# Altium PCB Nav_PCB.PcbDoc (part 2 of 2)
Units mil, origin at the board's own origin, x right, y up, seen from the top; angles counter-clockwise.
Board outline 7505 x 3865 mil, 2 copper layers (Top Layer, Bottom Layer); 202 components, 122 nets, 573 pads, 100 vias.
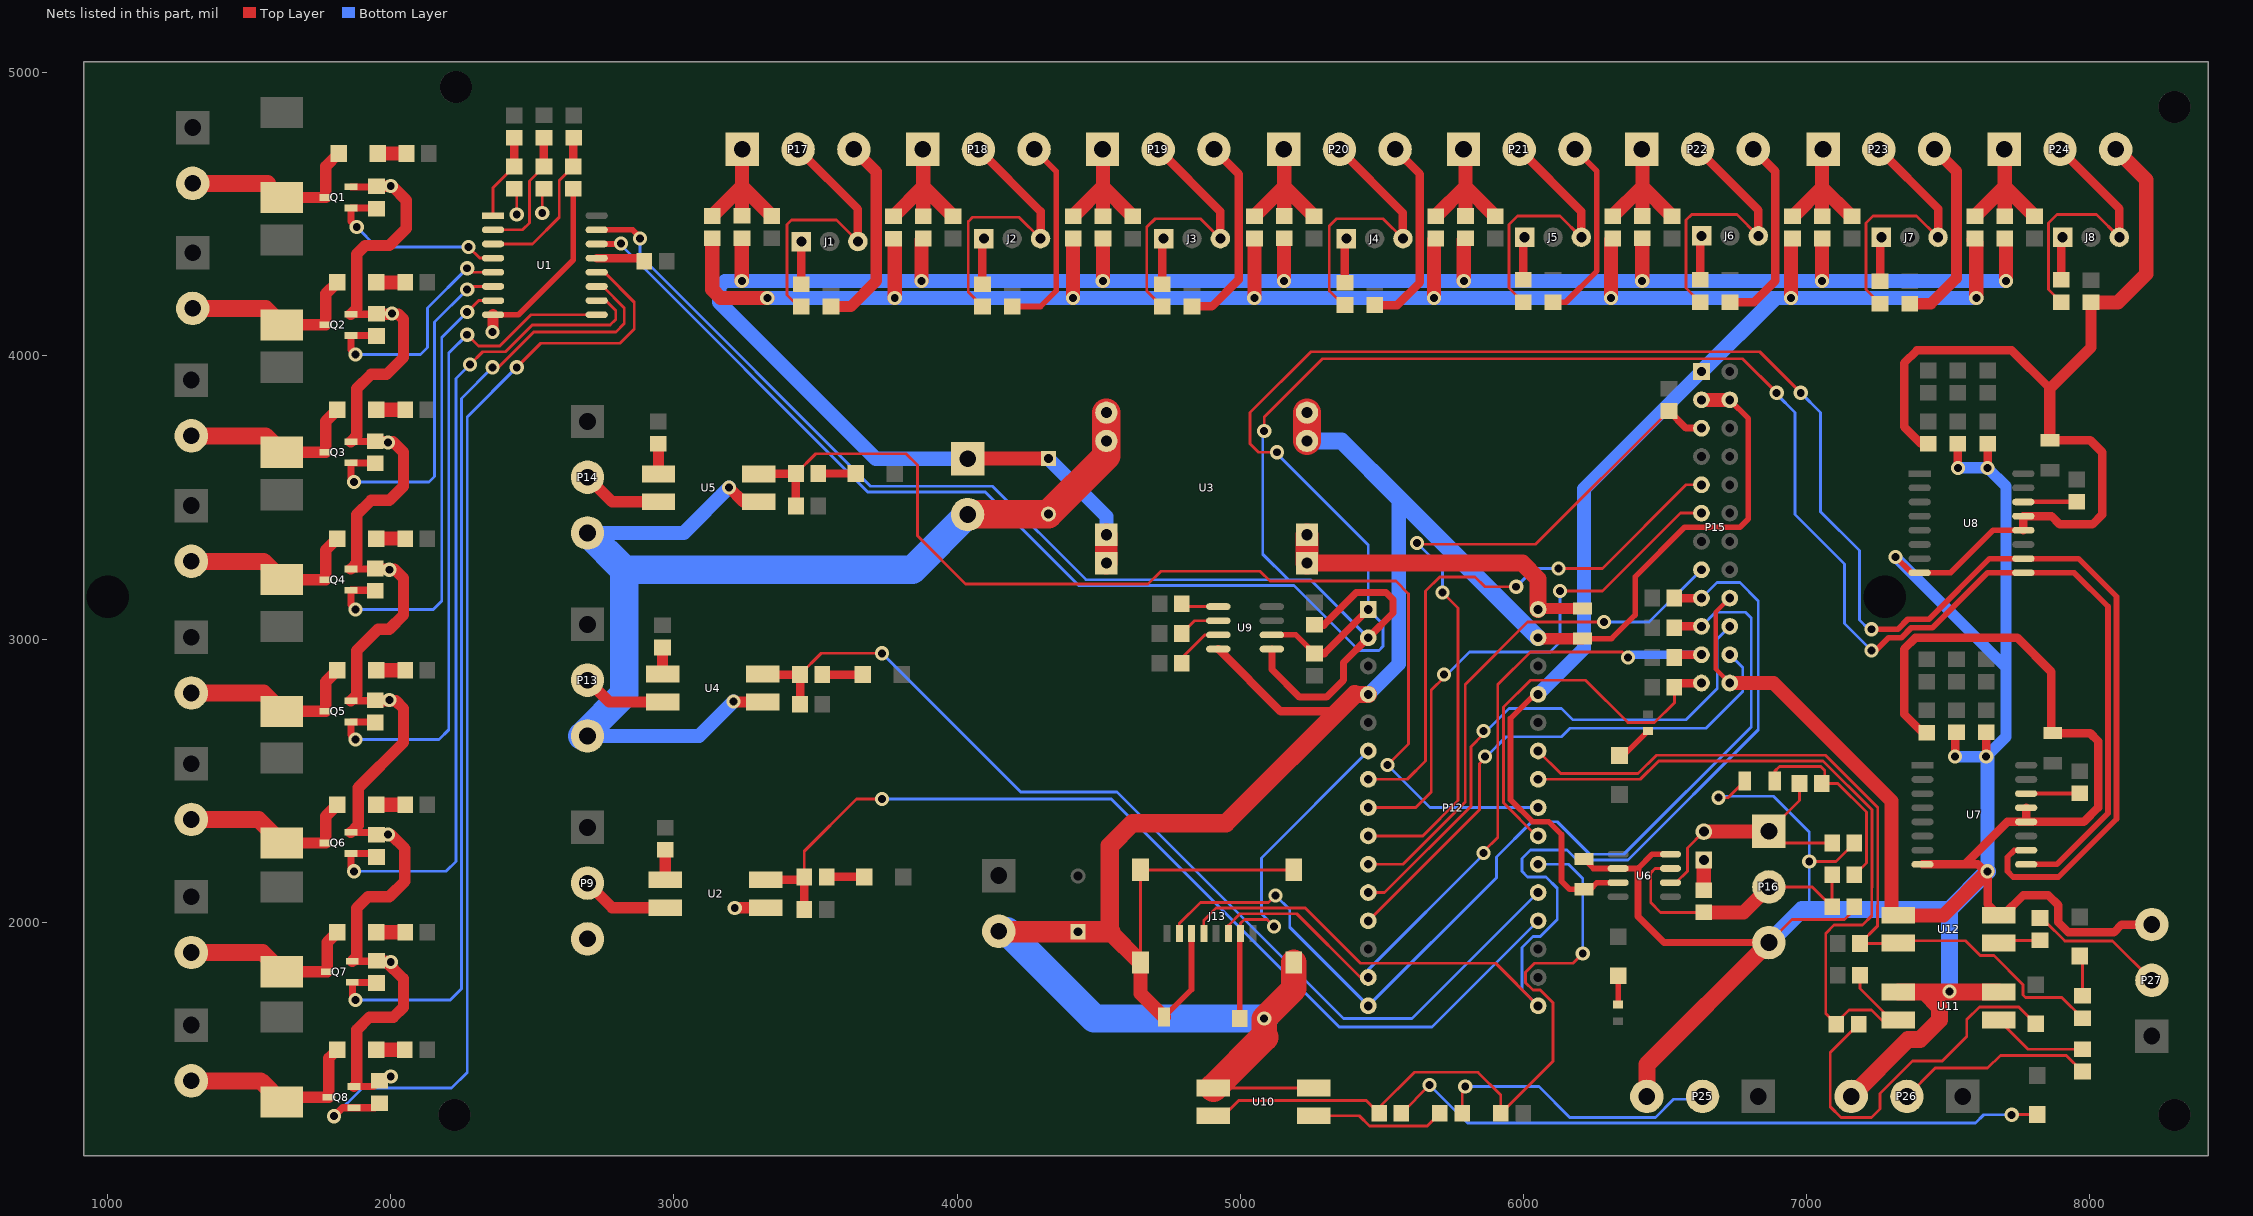
[diagram p2: the nets of this part, all layers, seen from the top]

## Via types
v1: diameter 50, hole 28, Top Layer to Bottom Layer, 100 vias

## Nets (pads, with @x,y where several pads share a name; then routed paths per layer and width w, separated by ;. In a path a pad name is that pad's centre, name@x,y a point inside that pad or via, vN(x,y) a via of type N, cw(c..) or ccw(c..) an arc to the next point about the centre after c; other vN are vias at no path point) (continued)
GND: C1.1 C2.2 C3.1 C4.1 C5.1 C6.1 C7.1 C8.1 D25.1 D26.1 J13.6 J13.9 P9.3 P10.2 P11.2 P12.4 P12.29 P13.3 P14.3 P15.3 P15.4 P15.18 P15.24 P16.3 P17.3 P18.3 P19.3 P20.3 P21.3 P22.3 P23.3 P24.3 P25.3 P26.3 P27.3 Q1.2 Q2.2 Q3.2 Q4.2 Q5.2 Q6.2 Q7.2 Q8.2 R5.1 R6.1 R7.1 R8.1 R16.1 R17.1 R18.1 R19.1 R20.1 R28.1 R33.1 R36.1 R37.1 R38.1 R41.1 R42.1 SB2.1 SB4.1 SB6.1 SB35.1 SB37.1 SB39.1 SB41.1 SB43.1 SB45.1 U1.8 U2.4 U3.0 U3.2 U4.4 U5.4 U6.2 U6.8 U7.8 U7.12 U7.13 U8.8 U8.12 U8.13 U9.4 U10.2 U10.4 U11.2 U11.4 U12.2 U12.4 | length 41071.6
  Top Layer w10: R18.1@1941.97,2317.4 R18.1@1950,2309.37 ; R5.1@1948.03,4597.4 R5.1@1950,4599.37 ; v1(2360,4085) v1@2361.26,4086.26 ; SB2.1@2436.26,4590.63 2435,4589.37 2445,4579.37 v1(2445,4500) ; v1(2535,4505) 2535,4584.37 SB4.1@2541.26,4590.63 ; v1(3210,2780) v1@3211.85,2778.15 ; v1(3215,2050) v1@3216.57,2051.57 ; P11.2@4037.52,3440 P11.2@4039.09,3441.57 ; P10.2@4147.52,1968.15 P10.2@4149.09,1966.57 ; J13.9@4648.03,1858.23 J13.9@4648.03,2185 J13.9@5189.37,2185 ; U10.4@4905.67,1415 U10.2@5260,1415 ; P12.29@6052.52,3005 P12.29@6055.67,3001.85 ; v1(6690,2440) 6723.57,2440 C8.1@6781.85,2498.28 ; P16.3@6835.67,1928.15 P16.3@6867.52,1928.15 6949.37,2010 7135,2010 7169.37,2044.37 D25.1@7169.37,2055 ; v1(7010,2215) 7104.63,2215 D26.1@7169.37,2279.74 ; U8.8@7370.63,3234.37 U8.8@7400,3234.37 ; SB35.1@7410,2670 SB35.1@7425,2670 ; SB37.1@7525,2665.63 SB37.1@7530,2670.63 ; v1@7630,2180 v1(7640,2180) ; U12.2@7679.33,2025 U12.2@7695,2025
  Top Layer w15: P15.24@6729.37,2845 6680,2894.37 6680,3095.63 P15.18@6729.37,3145
  Top Layer w20: U1.8@2361.26,4145.63 2450.63,4145.63 2645,4340 SB6.1@2645,4590.63 ; R33.1@4195,4175 4295,4175 4350,4230 4350,4652.48 P18.3@4272.48,4730 ; C7.1@4731.22,1665 4828.35,1762.13 J13.6@4828.35,1960.59 ; R37.1@6105,4190 6150,4190 6260,4300 6260,4652.48 P21.3@6182.48,4730 ; C3.1@6209.37,3001.85 6311.85,3001.85 6395,3085 6395,3220 6570,3395 6765,3395 6795,3425 6795,3779.37 P15.4@6729.37,3845 ; C1.1@6214.37,2223.15 6247.52,2190 U6.2@6335,2190 6405,2190 6455,2240 U6.8@6520.04,2240 ; v1(7315,3290) U8.8@7370.63,3234.37 ; U8.8@7400,3234.37 7509.37,3234.37 7659.37,3384.37 U8.12@7766.14,3384.37
  Top Layer w25: Q6.2@1859.29,2317.4 R18.1@1941.97,2317.4 ; Q5.2@1859.29,2782.4 R17.1@1943.03,2782.4 ; Q4.2@1859.29,3247.4 R8.1@1943.03,3247.4 ; Q3.2@1859.29,3697.4 R7.1@1943.03,3697.4 ; Q2.2@1859.29,4147.4 R6.1@1948.03,4147.4 ; Q1.2@1859.29,4597.4 R5.1@1948.03,4597.4 ; Q7.2@1864.29,1862.4 R19.1@1948.03,1862.4 ; Q8.2@1870,1419.8 1939.8,1419.8 R20.1@1960,1440 ; 6405,2190 6405,2020 6496.85,1928.15 P16.3@6835.67,1928.15
  Top Layer w30: R28.1@4830,4175 4900,4175 4995,4270 4995,4642.48 P19.3@4907.48,4730 ; U9.4@4923.03,2965 5143.03,2745 5340,2745 5400,2805 5405,2805 ; R36.1@5475,4180 5555,4180 5635,4260 5635,4642.48 P20.3@5547.48,4730 ; R38.1@6730,4190 6815,4190 6890,4265 6890,4652.48 P22.3@6812.48,4730 ; U7.8@7410,2204.37 7559.37,2204.37 ; SB35.1@7410,2670 7345,2735 7345,2965 7385,3005 7745,3005 7865,2885 7865,2667.52 8002.48,2667.52 8030,2640 8030,2405 7979.37,2354.37 U7.12@7776.14,2354.37 ; SB41.1@7430,3690 7405,3690 7345,3750 7345,3975 7390,4020 7725,4020 7860,3885 ; v1@7525,2590 SB37.1@7525,2665.63 ; v1(7535,3605) SB43.1@7535,3690 ; v1@7630,2180 7605.63,2204.37 7559.37,2204.37 ; v1(7635,2585) SB39.1@7635,2670.63 ; v1(7640,2180) 7640,2064.33 U12.2@7679.33,2025 ; v1(7640,3605) SB45.1@7640,3690 ; U12.2@7695,2025 7765,2095 7855,2095 7890,2060 7890,1999.49 7925.12,1964.37 8085.94,1964.37 8113.42,1991.85 P27.3@8220,1991.85 ; U8.12@7766.14,3384.37 U8.13@7766.14,3434.37 7865.63,3434.37 7895,3405 8010,3405 8045,3440 8045,3660 8002.48,3702.52 C6.1@7860,3702.52 ; U7.13@7776.14,2404.37 U7.12@7776.14,2354.37 ; 7559.37,2204.37 7709.37,2354.37 U7.12@7776.14,2354.37
  Top Layer w40: Q6.2@1859.29,2317.4 1885,2343.11 1885,2475 2045,2635 2045,2755 2017.6,2782.4 R17.1@1943.03,2782.4 ; Q5.2@1859.29,2782.4 1880,2803.11 1880,2960 1955,3035 1995,3035 2045,3085 2045,3215 2012.6,3247.4 R8.1@1943.03,3247.4 ; Q4.2@1859.29,3247.4 1880,3268.11 1880,3440 1930,3490 1995,3490 2045,3540 2045,3660 2007.6,3697.4 R7.1@1943.03,3697.4 ; Q3.2@1859.29,3697.4 1880,3718.11 1880,3885 1930,3935 1985,3935 2045,3995 2045,4130 2027.6,4147.4 R6.1@1948.03,4147.4 ; Q2.2@1859.29,4147.4 1880,4168.11 1880,4360 1910,4390 1995,4390 2055,4450 2055,4550 2005.63,4599.37 R5.1@1950,4599.37 ; Q7.2@1864.29,1862.4 1880,1878.11 1880,2050 1920,2090 1995,2090 2050,2145 2050,2260 2000.63,2309.37 R18.1@1950,2309.37 ; Q8.2@1870,1419.8 1880,1429.8 1880,1620 1925,1665 2010,1665 2045,1700 2045,1800 1982.6,1862.4 R19.1@1948.03,1862.4 ; v1@2361.26,4086.26 U1.8@2361.26,4145.63 ; v1(3195,3535) 3245,3485 U5.4@3300,3485 ; v1@3211.85,2778.15 U4.4@3314.33,2778.15 ; v1@3216.57,2051.57 U2.4@3324.33,2051.57 ; R16.1@3555,4175 3625,4175 3715,4265 3715,4650.63 P17.3@3635.63,4730 ; P12.29@6055.67,3001.85 C3.1@6209.37,3001.85 ; R41.1@7365,4185 7440,4185 7530,4275 7530,4652.48 P23.3@7452.48,4730 ; C6.1@7860,3702.52 7860,3885 8005,4030 R42.1@8005,4189.37
  Top Layer w50: J13.9@4648.03,1858.23 4648.03,1748.19 C7.1@4731.22,1665 ; P15.3@6629.37,3845 P15.4@6729.37,3845 ; P15.24@6729.37,2845 6883.43,2845 7300,2428.43 7300,2024.37 7484.37,2024.37 v1(7640,2180) ; R42.1@8005,4189.37 8099.37,4189.37 8200,4290 8200,4622.48 P24.3@8092.48,4730
  Top Layer w60: 4539.69,1966.57 J13.9@4648.03,1858.23 ; 5405,2805 P12.4@5452.52,2805 ; P25.3@6436.3,1385 6436.3,1496.93 P16.3@6867.52,1928.15 ; P26.3@7158.15,1385 7358.62,1585.47 7400.62,1585.47 7470,1654.85 7470,1700 7416.57,1753.43 ; U11.4@7325,1753.43 7416.57,1753.43 ; U11.2@7679.33,1753.43 7416.57,1753.43
  Top Layer w65: 4539.69,1966.57 4539.69,2269.69 4620,2350 4950,2350 5405,2805
  Top Layer w75: P10.2@4149.09,1966.57 C4.1@4427.52,1966.57 4539.69,1966.57
  Top Layer w90: 5085,1594.33 v1(5085,1660) 5189.37,1764.37 J13.9@5189.37,1858.23
  Top Layer w100: P11.2@4039.09,3441.57 C2.2@4322.52,3441.57 4527.52,3646.57 U3.0@4527.52,3700 U3.0@4527.52,3800 ; U10.4@4905.67,1415 5085,1594.33 ; U3.2@5236.18,3700 U3.2@5236.18,3800
  Bottom Layer w10: P13.3@2676.85,2658.15 P13.3@2695,2658.15 ; v1(6690,2440) 6695,2445 6883.69,2445 7010,2318.69 v1(7010,2215) 7010,2070.63 6985,2045.63 ; v1(7635,2585) v1@7640,2580
  Bottom Layer w40: v1(7315,3290) 7705,2900 ; v1(7525,2585) v1(7635,2585) 7705,2655 7705,2900 ; v1(7535,3605) v1(7640,3605) 7705,3540 7705,2900
  Bottom Layer w50: P13.3@2695,2658.15 3088.15,2658.15 v1(3210,2780) ; P14.3@2695,3375 3035,3375 v1(3195,3535) ; P12.4@5452.52,2805 5560,2912.48 5560,3497.52 ; v1(7640,2180) v1@7640,2580
  Bottom Layer w60: U3.2@5236.18,3700 5357.52,3700 5560,3497.52 P12.29@6052.52,3005 ; P16.3@6867.52,1928.15 6985,2045.63 7505.63,2045.63 ; v1(7505.63,1755.63) 7505.63,2045.63 ; v1(7640,2180) 7505.63,2045.63
  Bottom Layer w100: P13.3@2676.85,2658.15 2825,2806.3 2825,3245 ; P14.3@2695,3375 2825,3245 ; P11.2@4037.52,3440 3842.52,3245 2825,3245 ; P10.2@4147.52,1968.15 4176.85,1968.15 4485,1660 v1(5085,1660)
  other v1: 2000,1455 2000,1860 1990,2310 1995,2785 1995,3245 1990,3695 2005,4150 2000,4600
I2C1_SCL: P12.1 R31.1 U1.14 U7.10 U8.10 U9.6 | length 10339.5
  Top Layer w10: v1@2800.63,4395.63 2810.63,4395.63 v1(2812.82,4397.81) ; v1(5130,3660) 5065,3660 5035,3690 5035,3800 5250,4015 6835,4015 v1(6980,3870)
  Top Layer w20: U1.14@2727.4,4395.63 v1@2800.63,4395.63 ; U9.6@5112.01,3015 5196.89,3015 R31.1@5262.52,2949.37 ; v1(7230,3035) 7230,3045 7240,3035 7323.08,3035 7358.08,3070 7432.57,3070 7646.94,3284.37 U8.10@7766.14,3284.37 7960.63,3284.37 8095,3150 8095,2365 7890,2160 7730,2160 7710,2180 7710,2230 7734.37,2254.37 U7.10@7776.14,2254.37
  Top Layer w25: 5296.89,2949.37 P12.1@5452.52,3105
  Top Layer w30: R31.1@5262.52,2949.37 5296.89,2949.37
  Bottom Layer w10: v1(2812.82,4397.81) 2812.82,4392.19 3685,3520 4100,3520 4430,3190 5190,3190 5420,2960 5490,2960 5505,2975 5505,3052.52 P12.1@5452.52,3105 5452.52,3332.48 5130,3655 v1(5130,3660) ; v1(6980,3870) 7050,3800 7050,3450 7187,3313 7187,3068 7220,3035 v1(7230,3035)
I2C1_SDA: P12.2 R30.1 U1.15 U7.9 U8.9 U9.5 | length 10142.6
  Top Layer w10: v1(5085,3735) 5085,3785 5290,3990 6775,3990 v1(6895,3870)
  Top Layer w20: U1.15@2727.4,4445.63 2854.37,4445.63 2880,4420 v1(2880,4415) ; v1(7230,2960) 7245,2960 7290,3005 7335.5,3005 7370.5,3040 7445,3040 7639.37,3234.37 U8.9@7766.14,3234.37 7945.63,3234.37 8065,3115 8065,2385 7884.37,2204.37 U7.9@7776.14,2204.37
  Top Layer w25: U9.5@5112.01,2965 5112.01,2892.99 5210,2795 5305,2795 5365,2855 5365,2917.48 P12.2@5452.52,3005 5540,3092.48 5540,3140 5515,3165 5410,3165 5295.63,3050.63
  Top Layer w30: R30.1@5262.52,3050.63 5295.63,3050.63
  Bottom Layer w10: v1(2880,4415) 2880,4355 3695,3540 4125,3540 4455,3210 5170,3210 ; v1(5085,3735) 5080,3730 5080,3300 5170,3210 ; P12.2@5452.52,3005 5247.52,3210 5170,3210 ; v1(6895,3870) 6895,3865 6960,3800 6960,3440 7135,3265 7135,3055 v1(7230,2960)
IMU_DRDY: P12.10 P15.15 | length 1850.7
  Top Layer w10: P12.10@5452.52,2205 5575,2205 5795,2425 5795,2840 6015,3060 v1(6285,3060)
  Bottom Layer w10: v1(6285,3060) 6444.37,3060 P15.15@6629.37,3245
IMU_nRST: P12.9 P15.5 R26.1 | length 2548.1
  Top Layer w10: P12.9@5452.52,2305 5645,2305 5770,2430 5770,3110 v1@5727.5,3152.5 ; v1(5625,3340) 5630,3335 6043.74,3335 R26.1@6514.37,3805.63
  Top Layer w25: R26.1@6514.37,3805.63 6575,3745 P15.5@6629.37,3745
  Bottom Layer w10: v1(5625,3340) 5715,3250 v1(5715,3165)
IMU_SYNC_IN: P12.12 P15.22 | length 1905
  Top Layer w10: P12.12@5452.52,2005 5845,2397.48 5845,2560 5865,2580 v1(5865,2585)
  Bottom Layer w10: v1(5865,2585) 5870,2585 5940,2655 6135,2655 6165,2685 6645,2685 6775,2815 6775,2899.37 P15.22@6729.37,2945
IMU_SYNC_OUT: P12.11 P15.20 | length 1930.5
  Top Layer w10: P12.11@5452.52,2105 5510,2105 5815,2410 5815,2620 5860,2665 v1(5860,2675)
  Bottom Layer w10: v1(5860,2675) 5870,2675 5950,2755 6135,2755 6175,2715 6573.76,2715 6685,2826.24 6684.84,2826.4 6684.84,3000.47 P15.20@6729.37,3045
IO_A0: SB1.1 SB2.2 U1.1 | length 306.1
  Top Layer w10: U1.1@2361.26,4495.63 2361.26,4594.37 SB2.2@2436.26,4669.37
  Top Layer w30: SB2.2@2436.26,4669.37 SB1.1@2436.26,4770.63
IO_A1: SB3.1 SB4.2 U1.2 | length 461.3
  Top Layer w10: U1.2@2361.26,4445.63 2465.63,4445.63 2490,4470 2490,4618.11 SB4.2@2541.26,4669.37
  Top Layer w30: SB4.2@2541.26,4669.37 SB3.1@2541.26,4771.26
IO_A2: SB5.1 SB6.2 U1.3 | length 574.7
  Top Layer w10: U1.3@2361.26,4395.63 2500.63,4395.63 2595,4490 2595,4619.37 SB6.2@2645,4669.37 ; SB5.1@2645,4769.37 SB5.1@2646.26,4770.63
  Top Layer w30: SB6.2@2645,4669.37 SB5.1@2645,4769.37
Limit1: P12.21 R23.1 R45.1 U10.3 | length 2576.9
  Top Layer w10: U10.3@4905.67,1316.57 4941.57,1316.57 4995,1370 5445.63,1370 R23.1@5490.63,1325 5490.63,1345.63 5615,1470 5840,1470 5920.63,1389.37 R45.1@5920.63,1325 6105,1509.37 6105,1715.49 6060.02,1760.47 6034.08,1760.47 6007.99,1786.56 6007.99,1823.44 6039.55,1855 6175,1855 v1(6210,1890) ; v1(6210,1890) 6220,1900 6230,1890 v1(6210,1890)
  Bottom Layer w10: P12.21@6052.52,2205 6160,2205 6210,2155 v1(6210,1890)
Limit2: P12.24 R46.1 R48.1 U11.3 | length 2628.6
  Top Layer w10: P12.24@6052.52,2505 6413.28,2505 6478.28,2570 7059.14,2570 7231.93,2397.21 7231.93,2123.35 7230.94,2122.36 7230.94,2023.27 7197.67,1990 7097.33,1990 7068.07,1960.74 7068.07,1677.56 R46.1@7105.63,1640 7105.63,1645.63 7150,1690 7230,1690 7265,1655 U11.3@7300,1655 ; R48.1@7189.37,1812.63 7189.37,1765.63 U11.3@7300,1655 ; U11.3@7315,1655 U11.3@7300,1655
Limit3: P12.25 R49.1 R51.1 U12.3 | length 2767.6
  Top Layer w10: P12.25@6052.52,2605 6132.52,2525 6405,2525 6470,2590 7067.42,2590 7251.93,2405.49 7251.93,2061.73 7250.94,2060.74 7250.94,1989.26 7251.93,1988.27 7251.93,1987.56 R51.1@7189.37,1925 7350,1925 7360,1935 7561.11,1935 7614.06,1882.05 7662.95,1882.05 7765.47,1779.53 7765.47,1743.16 7774.26,1734.37 7901.89,1734.37 R49.1@7975,1661.26
LV_BATT+: C2.1 P11.1 SB13.1 SB14.1 SB15.1 SB22.1 SB23.1 SB24.1 SB30.1 SB31.1 U3.1 | length 7666.6
  Top Layer w10: SB14.1@3240,4415.63 SB14.1@3240.63,4416.26 ; SB13.1@3875,4409.37 SB13.1@3880.63,4415 ; P11.1@4037.52,3636.85 P11.1@4039.09,3638.43 ; SB22.1@5155,4415 SB22.1@5155.63,4415.63 ; SB23.1@5790,4410 SB23.1@5795.63,4415.63 ; SB24.1@6420,4415 SB24.1@6420.63,4415.63 ; SB30.1@7055,4414.37 SB30.1@7055.63,4415 ; SB31.1@7700,4414.37 SB31.1@7700.63,4415
  Top Layer w50: v1(3240,4265) SB14.1@3240,4415.63 ; v1(3875,4265) SB13.1@3875,4409.37 ; P11.1@4039.09,3638.43 C2.1@4322.52,3638.43 ; v1@4515.63,4265 SB15.1@4515.63,4415 ; v1(5155,4265) SB22.1@5155,4415 ; v1(5790,4265) SB23.1@5790,4410 ; v1(6420,4265) SB24.1@6420,4415 ; v1(7055,4265) SB30.1@7055,4414.37 ; SB31.1@7700,4414.37 7705,4409.37 v1(7705,4265)
  Top Layer w80: U3.1@4527.52,3268.5 U3.1@4527.52,3368.5
  Bottom Layer w50: P11.1@4037.52,3636.85 3713.15,3636.85 3160,4190 3160,4245 3180,4265 v1(3240,4265) v1(3875,4265) v1(4515,4265) v1(5155,4265) v1(5790,4265) v1(6420,4265) v1(7055,4265) v1(7705,4265) ; C2.1@4322.52,3638.43 4527.52,3433.43 U3.1@4527.52,3368.5
NetC3_2: C3.2 P12.30 U3.3 | length 1205.2
  Top Layer w10: P12.30@6052.52,3105 P12.30@6055.67,3108.15
  Top Layer w40: P12.30@6055.67,3108.15 C3.2@6209.37,3108.15
  Top Layer w60: U3.3@5236.18,3268.5 5996.5,3268.5 6052.52,3212.48 P12.30@6052.52,3105
  Top Layer w80: U3.3@5236.18,3268.5 U3.3@5236.18,3368.5
NetC8_2: C8.2 R22.1 R43.1 | length 713.4
  Top Layer w10: C8.2@6888.15,2498.28 6888.15,2533.15 6905,2550 7050.85,2550 7065,2535.85 7065,2500.63 R22.1@7054.37,2490 7110.85,2490 7211.93,2388.92 7211.93,2209.93 R43.1@7169.37,2167.37
NetD1_1: D1.1 D5.2 P1.2 Q1.1 | length 664.6
  Top Layer w10: D1.1@1565.63,4610 D1.1@1615.63,4560
  Top Layer w40: D1.1@1615.63,4560 Q1.1@1770.71,4560 1770.71,4669.61 D5.2@1816.1,4715
  Top Layer w60: P1.2@1300.63,4610 D1.1@1565.63,4610
NetD2_1: D2.1 D6.2 P2.2 Q2.1 | length 660.9
  Top Layer w40: D2.1@1615.63,4110 Q2.1@1770.71,4110 1770.71,4219.61 D6.2@1811.1,4260
  Top Layer w60: P2.2@1300.63,4168.15 1557.48,4168.15 D2.1@1615.63,4110
NetD3_1: D3.1 D7.2 P3.2 Q3.1 | length 665.9
  Top Layer w40: D3.1@1615.63,3660 Q3.1@1770.71,3660 1770.71,3769.61 D7.2@1811.1,3810
  Top Layer w60: P3.2@1295.63,3718.15 1557.48,3718.15 D3.1@1615.63,3660
NetD4_1: D4.1 D8.2 P4.2 Q4.1 | length 663.7
  Top Layer w40: D4.1@1615.63,3210 Q4.1@1770.71,3210 1770.71,3314.61 D8.2@1811.1,3355
  Top Layer w60: P4.2@1295.63,3275 1550.63,3275 D4.1@1615.63,3210
NetD5_1: D5.1 R1.1 | length 101.7
  Top Layer w50: D5.1@1953.9,4715 R1.1@2055.63,4715
NetD6_1: D6.1 R2.1 | length 101.7
  Top Layer w50: D6.1@1948.9,4260 R2.1@2050.63,4260
NetD7_1: D7.1 R3.1 | length 101.7
  Top Layer w50: D7.1@1948.9,3810 R3.1@2050.63,3810
NetD8_1: D8.1 R4.1 | length 101.7
  Top Layer w50: D8.1@1948.9,3355 R4.1@2050.63,3355
NetD9_1: D9.1 D13.2 P5.2 Q5.1 | length 663.7
  Top Layer w40: D9.1@1615.63,2745 Q5.1@1770.71,2745 1770.71,2849.61 D13.2@1811.1,2890
  Top Layer w60: P5.2@1295.63,2810 1550.63,2810 D9.1@1615.63,2745
NetD10_1: D10.1 D14.2 P6.2 Q6.1 | length 661.3
  Top Layer w40: D10.1@1615.63,2280 Q6.1@1770.71,2280 1770.71,2374.61 D14.2@1811.1,2415
  Top Layer w60: P6.2@1295.63,2363.15 1532.48,2363.15 D10.1@1615.63,2280
NetD11_1: D11.1 D15.2 P7.2 Q7.1 | length 663
  Top Layer w40: D11.1@1615.63,1825 Q7.1@1775.71,1825 1775.71,1929.61 D15.2@1811.1,1965
  Top Layer w60: P7.2@1295.63,1893.15 1547.48,1893.15 D11.1@1615.63,1825
NetD12_1: D12.1 D16.2 P8.2 Q8.1 | length 704
  Top Layer w10: D12.1@1615.63,1365 D12.1@1633.03,1382.4
  Top Layer w40: D12.1@1633.03,1382.4 Q8.1@1781.42,1382.4 1781.42,1520.32 D16.2@1811.1,1550
  Top Layer w60: P8.2@1295.63,1440 1540.63,1440 D12.1@1615.63,1365
NetD13_1: D13.1 R10.1 | length 101.7
  Top Layer w50: D13.1@1948.9,2890 R10.1@2050.63,2890
NetD14_1: D14.1 R11.1 | length 101.7
  Top Layer w50: D14.1@1948.9,2415 R11.1@2050.63,2415
NetD15_1: D15.1 R12.1 | length 101.7
  Top Layer w50: D15.1@1948.9,1965 R12.1@2050.63,1965
NetD16_1: D16.1 R13.1 | length 101.1
  Top Layer w50: D16.1@1948.9,1550 R13.1@2050,1550
NetD17_1: D17.1 R21.2 | length 135.9
  Top Layer w10: D17.1@6340,2588.9 D17.1@6353.43,2588.9
  Top Layer w20: D17.1@6353.43,2588.9 R21.2@6440,2675.47
NetD18_1: D18.1 R25.2 | length 101.6
  Top Layer w20: R25.2@6335,1709.53 D18.1@6335,1811.1
NetD19_2: D19.2 R23.2 | length 2371.4
  Top Layer w10: R23.2@5569.37,1325 v1(5669.37,1425) v1@5679.37,1435 ; v1(7725,1320) 7725,1322.2 7726.1,1321.1 D19.2@7815,1321.1
  Bottom Layer w10: v1(5669.37,1425) 5803.43,1290.94 7597.12,1290.94 7626.17,1320 v1(7725,1320)
NetD20_2: D20.2 R53.2 | length 132.8
  Top Layer w30: R53.2@3539.37,2160 D20.2@3672.2,2160
NetD21_2: D21.2 R56.2 | length 142.8
  Top Layer w30: R56.2@3524.37,2875 D21.2@3667.2,2875
NetD22_2: D22.2 R59.2 | length 132.2
  Top Layer w30: R59.2@3510,3585 D22.2@3642.2,3585
NetD23_2: D23.2 R46.2 | length 1329
  Top Layer w10: R46.2@7184.37,1640 7084.09,1539.72 7084.09,1348.42 7122.51,1310 7230,1310 7260,1340 7260,1394.73 7375.27,1510 7480,1510 7566.37,1596.37 7566.37,1656.37 7611.1,1701.1 7750,1701.1 D23.2@7810,1641.1
NetD24_2: D24.2 R49.2 | length 145.2
  Top Layer w10: D24.2@7965,1881.1 7975,1871.1 R49.2@7975,1740
NetD25_2: D25.2 P16.2 R24.2 R43.2 U6.7 | length 1015
  Top Layer w10: U6.7@6520.04,2190 6465,2190 6450,2175 6450,2070 6485,2035 R24.2@6637.52,2035 ; P16.2@6867.52,2125 7020.63,2125 D25.2@7090.63,2055 R43.2@7090.63,2167.37
  Top Layer w50: R24.2@6637.52,2035 6777.52,2035 P16.2@6867.52,2125
NetD26_2: D26.2 P16.1 P33.2 R22.2 U6.6 | length 925.7
  Top Layer w10: U6.6@6520.04,2140 6540,2140 6580,2180 6580,2262.48 P33.2@6637.52,2320 ; R22.2@6975.63,2490 6975.63,2429.96 P16.1@6867.52,2321.85 6865.67,2320 6905.92,2279.74 D26.2@7090.63,2279.74
  Top Layer w50: P33.2@6637.52,2320 P16.1@6865.67,2320
NetJ1_1: J1.1 R14.1 | length 150.6
  Top Layer w30: R14.1@3450,4253.74 J1.1@3450,4404.37
NetJ1_3: J1.3 P17.2 R14.2 | length 1017.2
  Top Layer w10: R14.2@3450,4175 3440,4175 3400,4215 3400,4465 3415,4480 3574.37,4480 J1.3@3650,4404.37
  Top Layer w30: P17.2@3438.78,4730 3650,4518.78 J1.3@3650,4404.37
NetJ2_1: J2.1 R32.1 | length 162.7
  Top Layer w10: J2.1@4090,4409.37 J2.1@4095,4414.37
  Top Layer w30: R32.1@4090,4253.74 J2.1@4090,4409.37
NetJ2_3: J2.3 P18.2 R32.2 | length 1019.7
  Top Layer w10: R32.2@4090,4175 4040,4225 4040,4475 4055,4490 4219.37,4490 J2.3@4295,4414.37
  Top Layer w30: P18.2@4075.63,4730 4295,4510.63 J2.3@4295,4414.37
NetJ3_1: J3.1 R15.1 | length 162.7
  Top Layer w10: J3.1@4725,4409.37 J3.1@4730,4414.37
  Top Layer w30: R15.1@4725,4253.74 J3.1@4725,4409.37
NetJ3_3: J3.3 P19.2 R15.2 | length 1011
  Top Layer w10: R15.2@4725,4175 4670,4230 4670,4455 4700,4485 4859.37,4485 J3.3@4930,4414.37
  Top Layer w30: P19.2@4710.63,4730 4930,4510.63 J3.3@4930,4414.37
NetJ4_1: J4.1 R29.1 | length 157.7
  Top Layer w10: J4.1@5370,4409.37 J4.1@5375,4414.37
  Top Layer w30: R29.1@5370,4258.74 J4.1@5370,4409.37
NetJ4_3: J4.3 P20.2 R29.2 | length 1013.9
  Top Layer w10: R29.2@5370,4180 5365,4180 5315,4230 5315,4460 5340,4485 5504.37,4485 J4.3@5575,4414.37
  Top Layer w30: P20.2@5350.63,4730 5575,4505.63 J4.3@5575,4414.37
NetJ5_1: J5.1 R34.1 | length 152.7
  Top Layer w10: J5.1@6000,4414.37 J5.1@6005,4419.37
  Top Layer w30: R34.1@6000,4268.74 J5.1@6000,4414.37
NetJ5_3: J5.3 P21.2 R34.2 | length 996
  Top Layer w10: R34.2@6000,4190 5950,4240 5950,4465 5980,4495 6129.37,4495 J5.3@6205,4419.37
  Top Layer w30: P21.2@5985.63,4730 6205,4510.63 J5.3@6205,4419.37
NetJ6_1: J6.1 R35.1 | length 157.7
  Top Layer w10: J6.1@6625,4419.37 J6.1@6630,4424.37
  Top Layer w30: R35.1@6625,4268.74 J6.1@6625,4419.37
NetJ6_3: J6.3 P22.2 R35.2 | length 999.7
  Top Layer w10: R35.2@6625,4190 6575,4240 6575,4480 6595,4500 6754.37,4500 J6.3@6830,4424.37
  Top Layer w30: P22.2@6615.63,4730 6830,4515.63 J6.3@6830,4424.37
NetJ7_1: J7.1 R39.1 | length 157.7
  Top Layer w10: J7.1@7260,4414.37 J7.1@7265,4419.37
  Top Layer w30: R39.1@7260,4263.74 J7.1@7260,4414.37
NetJ7_3: J7.3 P23.2 R39.2 | length 999.7
  Top Layer w10: R39.2@7260,4185 7210,4235 7210,4470 7235,4495 7389.37,4495 J7.3@7465,4419.37
  Top Layer w30: P23.2@7255.63,4730 7465,4520.63 J7.3@7465,4419.37
NetJ8_1: J8.1 R40.1 | length 152.7
  Top Layer w10: J8.1@7900,4414.37 J8.1@7905,4419.37
  Top Layer w30: R40.1@7900,4268.74 J8.1@7900,4414.37
NetJ8_3: J8.3 P24.2 R40.2 | length 991.8
  Top Layer w10: R40.2@7900,4190 7855,4235 7855,4470 7885,4500 8024.37,4500 J8.3@8105,4419.37
  Top Layer w30: P24.2@7895.63,4730 8105,4520.63 J8.3@8105,4419.37
NetP9_2: P9.2 U2.2 | length 310.9
  Top Layer w40: P9.2@2695,2138.15 2781.57,2051.57 U2.2@2970,2051.57
NetP13_2: P13.2 U4.2 | length 296.8
  Top Layer w40: P13.2@2695,2855 2771.85,2778.15 U4.2@2960,2778.15
NetP14_2: P14.2 U5.2 | length 286.6
  Top Layer w40: P14.2@2695,3571.85 2781.85,3485 U5.2@2945.67,3485
NetP17_1: P17.1 SB11.2 SB14.2 SB17.2 | length 532.5
  Top Layer w10: P17.1@3240.63,4728.7 P17.1@3241.93,4730
  Top Layer w50: SB11.2@3135.63,4494.37 3240.63,4599.37 ; SB14.2@3240.63,4495 3240.63,4599.37 ; P17.1@3240.63,4728.7 3240.63,4599.37 ; SB17.2@3345.63,4494.37 3240.63,4599.37
NetP18_1: P18.1 SB10.2 SB13.2 SB16.2 | length 534
  Top Layer w10: P18.1@3878.78,4730 P18.1@3880.63,4728.15 ; 3880.63,4598.11 3880.63,4598.74
  Top Layer w50: SB10.2@3775.63,4493.11 3880.63,4598.11 SB13.2@3880.63,4493.74 ; P18.1@3880.63,4728.15 3880.63,4598.74 SB16.2@3985.63,4493.74
NetP19_1: P19.1 SB12.2 SB15.2 SB18.2 | length 533.8
  Top Layer w10: P19.1@4513.78,4730 P19.1@4515.63,4728.15 ; 4515,4598.11 4515.63,4598.11
  Top Layer w50: SB12.2@4410.63,4493.74 4515,4598.11 ; SB15.2@4515.63,4493.74 4515.63,4598.11 ; P19.1@4515.63,4728.15 4515.63,4598.11 ; SB18.2@4620.63,4493.11 4515.63,4598.11
NetP20_1: P20.1 SB19.2 SB22.2 SB25.2 | length 533.4
  Top Layer w10: P20.1@5153.78,4730 P20.1@5155.63,4728.15
  Top Layer w50: SB19.2@5050.63,4493.74 5155.63,4598.74 ; SB22.2@5155.63,4494.37 5155.63,4598.74 ; P20.1@5155.63,4728.15 5155.63,4598.74 ; SB25.2@5260.63,4493.74 5155.63,4598.74
NetP21_1: P21.1 SB20.2 SB23.2 SB26.2 | length 535.5
  Top Layer w10: P21.1@5788.78,4730 P21.1@5795.63,4723.15
  Top Layer w50: SB20.2@5690.63,4493.74 5795.63,4598.74 ; SB23.2@5795.63,4494.37 5795.63,4598.74 ; P21.1@5795.63,4723.15 5795.63,4598.74 ; SB26.2@5900.63,4493.74 5795.63,4598.74
NetP22_1: P22.1 SB21.2 SB24.2 SB27.2 | length 533.4
  Top Layer w10: P22.1@6418.78,4730 P22.1@6420.63,4728.15
  Top Layer w50: SB21.2@6315.63,4493.74 6420.63,4598.74 ; SB24.2@6420.63,4494.37 6420.63,4598.74 ; P22.1@6420.63,4728.15 6420.63,4598.74 ; SB27.2@6525.63,4493.74 6420.63,4598.74
NetP23_1: P23.1 SB28.2 SB30.2 SB32.2 | length 531.5
  Top Layer w10: SB28.2@6950.63,4493.74 SB28.2@6954.37,4493.74 ; P23.1@7055.63,4726.85 P23.1@7058.78,4730 ; SB32.2@7156.89,4493.74 SB32.2@7160.63,4493.74
  Top Layer w50: SB28.2@6954.37,4493.74 7055.63,4595 ; SB30.2@7055.63,4493.74 7055.63,4595 ; P23.1@7055.63,4726.85 7055.63,4595 ; SB32.2@7156.89,4493.74 7055.63,4595
NetP24_1: P24.1 SB29.2 SB31.2 SB33.2 | length 534
  Top Layer w10: P24.1@7698.78,4730 P24.1@7700.63,4728.15
  Top Layer w50: SB29.2@7595.63,4493.74 7700.63,4598.74 ; SB31.2@7700.63,4493.74 7700.63,4598.74 ; P24.1@7700.63,4728.15 7700.63,4598.74 ; SB33.2@7805.63,4493.74 7700.63,4598.74
NetP25_2: P25.2 R44.1 | length 1013.4
  Top Layer w10: R44.1@5784.37,1325 5784.37,1409.37 v1(5795,1420)
  Bottom Layer w10: v1(5795,1420) 6055,1420 6164.06,1310.94 6466.97,1310.94 6531.03,1375 6623.15,1375 P25.2@6633.15,1385
NetP26_2: P26.2 R47.1 | length 703.7
  Top Layer w10: P26.2@7355,1385 7455,1485 7640,1485 7685,1530 7917.82,1530 R47.1@7975,1472.82
NetP27_2: P27.2 R50.1 | length 473.1
  Top Layer w10: R50.1@7845,2014.37 7845,2002.06 7912.69,1934.37 8080.63,1934.37 P27.2@8220,1795
NetP33_1: P33.1 R24.1 | length 106.3
  Top Layer w50: R24.1@6637.52,2113.74 P33.1@6637.52,2220
NetR9_1: R9.1 U1.13 | length 149.1
  Top Layer w10: U1.13@2727.4,4345.63 U1.13@2728.03,4345
  Top Layer w30: U1.13@2728.03,4345 R9.1@2876.26,4345
NetR27_2: R27.2 U7.14 | length 189.1
  Top Layer w10: U7.14@7776.14,2454.37 U7.14@7776.77,2455
  Top Layer w15: U7.14@7776.77,2455 R27.2@7965,2455
NetR44_2: R44.2 U10.1 | length 479
  Top Layer w10: U10.1@5260,1316.57 5420.76,1316.57 5456.86,1280.47 5661.1,1280.47 R44.2@5705.63,1325
NetR47_2: R47.2 U11.1 | length 338.5
  Top Layer w10: U11.1@7679.33,1655 7782.77,1551.56 R47.2@7975,1551.56
NetR50_2: R50.2 U12.1 | length 169.4
  Top Layer w10: U12.1@7679.33,1926.57 7688.39,1935.63 R50.2@7845,1935.63
NetR52_2: R52.2 U8.14 | length 189.1
  Top Layer w10: U8.14@7766.14,3484.37 U8.14@7766.77,3485
  Top Layer w15: U8.14@7766.77,3485 R52.2@7955,3485
NetR54_2: R54.2 U2.1 | length 105.6
  Top Layer w40: U2.1@2970,2150 R54.2@2970,2255.63
NetR57_2: R57.2 U4.1 | length 94.1
  Top Layer w40: U4.1@2960,2876.57 R57.2@2960,2970.63
NetR60_2: R60.2 U5.1 | length 106.9
  Top Layer w10: R60.2@2945,3690 R60.2@2945.67,3689.33
  Top Layer w40: U5.1@2945.67,3583.43 R60.2@2945.67,3689.33
NetSB7_1: SB7.1 U9.1 | length 132.8
  Top Layer w10: SB7.1@4794.37,3125 4804.37,3115 U9.1@4923.03,3115
NetSB8_1: SB8.1 U9.2 | length 147.9
  Top Layer w10: SB8.1@4793.74,3020 4838.74,3065 U9.2@4923.03,3065
NetSB9_1: SB9.1 U9.3 | length 181.7
  Top Layer w10: SB9.1@4793.74,2915 4793.74,2933.74 4875,3015 U9.3@4923.03,3015
POS5V: C1.2 P12.27 P15.1 SB10.1 SB11.1 SB12.1 SB19.1 SB20.1 SB21.1 SB28.1 SB29.1 U6.3 | length 8929.4
  Top Layer w10: SB10.1@3770,4408.74 SB10.1@3775.63,4414.37 ; SB12.1@4410,4414.37 SB12.1@4410.63,4415 ; SB20.1@5685,4409.37 SB20.1@5690.63,4415 ; P12.27@6040,2805 P12.27@6052.52,2805 ; SB21.1@6310,4409.37 SB21.1@6315.63,4415 ; SB28.1@6945,4409.37 SB28.1@6950.63,4415 ; SB29.1@7590,4409.37 SB29.1@7595.63,4415
  Top Layer w20: P12.27@6040,2805 5955,2720 5955,2432.48 6032,2355.47 6089.53,2355.47 6135,2310 6135,2145 6163.15,2116.85 C1.2@6214.37,2116.85 6236.85,2116.85 6260,2140 U6.3@6335,2140
  Top Layer w50: SB11.1@3135.63,4415.63 3135.63,4234.37 3165,4205 v1(3330,4205) ; SB10.1@3770,4408.74 3780,4398.74 v1(3780,4205) ; v1(4410,4205) SB12.1@4410,4414.37 ; v1@5050.63,4205 SB19.1@5050.63,4415 ; v1(5685,4205) SB20.1@5685,4409.37 ; v1(6310,4205) SB21.1@6310,4409.37 ; v1(6945,4205) SB28.1@6945,4409.37 ; SB29.1@7590,4409.37 7600,4399.37 v1(7600,4205)
  Bottom Layer w10: 6885,4200.63 6885,4205
  Bottom Layer w50: v1(3330,4205) v1(3780,4205) v1(4410,4205) v1(5050,4205) v1(5685,4205) v1(6310,4205) 6885,4205 v1(6945,4205) v1(7600,4205) ; P12.27@6052.52,2805 6215,2967.48 6215,3530.63 P15.1@6629.37,3945
  Bottom Layer w55: P15.1@6629.37,3945 6885,4200.63
RETRO1: P12.19 R53.1 R55.1 U2.3 | length 3503.1
  Top Layer w10: R53.1@3450.63,2150 R53.1@3460.63,2160 3460.63,2250.63 3645,2435 v1(3735,2435)
  Top Layer w30: U2.3@3324.33,2150 R53.1@3450.63,2150 ; R55.1@3460.63,2045 R53.1@3460.63,2160
  Bottom Layer w10: v1(3735,2435) 4545,2435 5350,1630 5677.52,1630 P12.19@6052.52,2005
RETRO2: P12.20 R56.1 R58.1 U4.3 | length 3593.6
  Top Layer w10: U4.3@3314.33,2876.57 U4.3@3315.91,2875 ; R56.1@3445.63,2875 3520.63,2950 v1(3735,2950)
  Top Layer w30: U4.3@3315.91,2875 R56.1@3445.63,2875 R58.1@3445.63,2770
  Bottom Layer w10: v1(3735,2950) 4225,2460 4565,2460 5365,1660 5607.52,1660 P12.20@6052.52,2105
RETRO3: P12.23 R59.1 R61.1 U5.3 | length 4059.1
  Top Layer w10: R59.1@3429.68,3583.43 R59.1@3431.26,3585 3501.26,3655 3820,3655 3860,3615 3860,3365 4030,3195 4675,3195 4720,3240 5070,3240 5105,3205 5550,3205 5595,3160 5595,2630 v1(5520,2555)
  Top Layer w30: U5.3@3300,3583.43 R59.1@3429.68,3583.43 ; R61.1@3431.26,3470 R59.1@3431.26,3585
  Bottom Layer w10: v1(5520,2555) 5670,2405 P12.23@6052.52,2405
SD_CS: J13.2 P12.6 R69.2 | length 1267.1
  Top Layer w10: J13.2@4998.74,1957.76 J13.2@5001.57,1960.59 5001.57,1996.57 5015,2010 5095,2010 v1(5120,1985)
  Top Layer w20: R69.2@4998.74,1660 J13.2@4998.74,1957.76
  Bottom Layer w10: v1(5120,1985) 5075,2030 5075,2227.48 P12.6@5452.52,2605
SOL1: Q1.3 R5.2 U1.4 | length 694.3
  Top Layer w10: R5.2@1948.03,4522.6 R5.2@1950,4520.63 ; v1(2275,4385) 2314.37,4345.63 U1.4@2361.26,4345.63
  Top Layer w25: v1(1880,4455) 1859.29,4475.71 Q1.3@1859.29,4522.6 R5.2@1948.03,4522.6
  Bottom Layer w10: v1(1880,4455) 1950,4385 v1(2275,4385)
SOL2: Q2.3 R6.2 U1.5 | length 866.2
  Top Layer w10: R6.2@1948.03,4072.6 R6.2@1950,4070.63 ; v1(2270,4310) 2284.37,4295.63 U1.5@2361.26,4295.63
  Top Layer w25: v1(1875,4005) 1859.29,4020.71 Q2.3@1859.29,4072.6 R6.2@1948.03,4072.6
  Bottom Layer w10: v1(1875,4005) 2105,4005 2130,4030 2130,4170 v1(2270,4310)
SOL3: Q3.3 R7.2 U1.6 | length 1255.1
  Top Layer w10: R7.2@1943.03,3622.6 R7.2@1945,3620.63 ; v1(2270,4235) 2280.63,4245.63 U1.6@2361.26,4245.63
  Top Layer w25: v1(1870,3555) 1859.29,3565.71 Q3.3@1859.29,3622.6 R7.2@1943.03,3622.6
  Bottom Layer w10: v1(1870,3555) 2135,3555 2155,3575 2155,4120 v1(2270,4235)
SOL4: Q4.3 R8.2 U1.7 | length 1643.4
  Top Layer w10: R8.2@1943.03,3172.6 R8.2@1945,3170.63 ; v1(2270,4155) 2310.63,4195.63 U1.7@2361.26,4195.63
  Top Layer w25: v1(1875,3105) 1859.29,3120.71 Q4.3@1859.29,3172.6 R8.2@1943.03,3172.6
  Bottom Layer w10: v1(1875,3105) 2150,3105 2180,3135 2180,4065 v1(2270,4155)
SOL5: Q5.3 R17.2 U1.9 | length 2441.8
  Top Layer w10: R17.2@1943.03,2707.6 R17.2@1945,2705.63 ; v1(2270,4075) 2310,4035 2385,4035 2495.63,4145.63 U1.9@2727.4,4145.63
  Top Layer w25: v1(1875,2645) 1859.29,2660.71 Q5.3@1859.29,2707.6 R17.2@1943.03,2707.6
  Bottom Layer w10: v1(1875,2645) 2170,2645 2205,2680 2205,4010 v1(2270,4075)
SOL6: Q6.3 R18.2 U1.10 | length 3006.5
  Top Layer w10: R18.2@1938.03,2242.6 R18.2@1950,2230.63 ; v1(2280,3970) 2325,4015 2405,4015 2500,4110 2775,4110 2795,4130 2795,4160 2759.37,4195.63 U1.10@2727.4,4195.63
  Top Layer w25: v1(1870,2180) 1859.29,2190.71 Q6.3@1859.29,2242.6 R18.2@1938.03,2242.6
  Bottom Layer w10: v1(1870,2180) 2195,2180 2230,2215 2230,3920 v1(2280,3970)
SOL7: Q7.3 R19.2 U1.11 | length 3498.8
  Top Layer w10: R19.2@1948.03,1787.6 R19.2@1950,1785.63 ; v1(2360,3960) 2380,3960 2505,4085 2795,4085 2825,4115 2825,4170 2749.37,4245.63 U1.11@2727.4,4245.63
  Top Layer w25: v1(1875,1725) 1864.29,1735.71 Q7.3@1864.29,1787.6 R19.2@1948.03,1787.6
  Bottom Layer w10: v1(1875,1725) 2210,1725 2250,1765 2250,3850 v1(2360,3960)
SOL8: Q8.3 R20.2 U1.12 | length 4018.1
  Top Layer w10: v1(2445,3960) 2530,4045 2810,4045 2860,4095 2860,4190 2754.37,4295.63 U1.12@2727.4,4295.63
  Top Layer w25: v1(1800,1315) 1830,1345 Q8.3@1870,1345 1943.74,1345 R20.2@1960,1361.26
  Bottom Layer w10: v1(1800,1315) 1900,1415 2215,1415 2270,1470 2270,3785 v1(2445,3960)
SPI3_MISO: J13.7 P12.15 P15.19 R66.2 | length 3527
  Top Layer w10: J13.7@4785.04,1960.59 4785.04,1995.04 4860,2070 5100,2070 v1(5125,2095) ; R66.2@6533.74,3040 R66.2@6538.74,3045
  Top Layer w30: R66.2@6538.74,3045 P15.19@6629.37,3045
  Bottom Layer w10: v1(5125,2095) 5175,2045 5175,1982.52 P12.15@5452.52,1705 5905,2157.48 5905,2230 6030,2355 6120,2355 6235,2240 6355,2240 6805,2690 6805,3075 6785,3095 6679.37,3095 P15.19@6629.37,3045
SPI3_MOSI: J13.3 P12.14 P15.21 R67.2 | length 2743.2
  Top Layer w10: J13.3@4958.27,1960.59 4958.27,1988.27 5000,2030 5200,2030 5425,1805 P12.14@5452.52,1805 ; v1(5860,2245) 5860,2250 5910,2300 5910,2840 6025,2955 6350,2955 v1(6370,2935) ; R67.2@6533.74,2935 R67.2@6543.74,2945
  Top Layer w30: R67.2@6543.74,2945 P15.21@6629.37,2945
  Bottom Layer w10: P12.14@5452.52,1805 5452.52,1832.52 5865,2245 v1(5860,2245) ; v1(6370,2935) v1@6380,2945
  Bottom Layer w30: v1@6380,2945 P15.21@6629.37,2945
SPI3_SCLK: J13.5 P12.16 P15.17 R65.2 | length 3941.9
  Top Layer w10: J13.5@4871.65,1960.59 4871.65,2006.65 4915,2050 5230,2050 5425,1855 5902.52,1855 P12.16@6052.52,1705
  Top Layer w30: R65.2@6533.74,3145 P15.17@6629.37,3145
  Bottom Layer w10: P12.16@6052.52,1705 5995,1762.52 5995,1910.45 6034.08,1949.53 6060.02,1949.53 6120,2009.51 6120,2120 6080,2160 6015,2160 5995,2180 5995,2225 6025,2255 6155,2255 6190,2220 6370,2220 6830,2680 6830,3135 6765,3200 6684.37,3200 P15.17@6629.37,3145
SPI3_SSEL: P12.22 P15.23 R68.2 | length 1399
  Top Layer w10: P12.22@6052.52,2305 6047.12,2305 5930,2422.12 5930,2760 6025,2855 6220,2855 6369.25,2705.75 6463.93,2705.75 6533.74,2775.56 R68.2@6533.74,2830 R68.2@6548.74,2845
  Top Layer w30: R68.2@6548.74,2845 P15.23@6629.37,2845
UART1_RX: P12.7 P15.9 | length 1988.1
  Top Layer w10: P12.7@5452.52,2505 5590,2505 5655,2570 5655,3170 5705,3220 5830,3220 5865,3185 v1(5975,3185) ; v1(6125,3250) 6280,3250 6575,3545 P15.9@6629.37,3545
  Bottom Layer w10: v1(5975,3185) 6040,3250 v1(6125,3250)
UART1_TX: P12.8 P15.11 | length 1929.8
  Top Layer w10: P12.8@5452.52,2405 5620,2405 5675,2460 5675,2820 5720,2865 v1(5720,2875) ; v1(6130,3170) 6280,3170 6555,3445 P15.11@6629.37,3445
  Bottom Layer w10: v1(5720,2875) 5730,2875 5810,2955 6095,2955 6130,2990 v1(6130,3170)
pads on no net: J13.1 J13.8 P12.3 P12.18 P12.26 P12.28 P15.6 P15.7 P15.8 P15.10 P15.12 P15.13 P15.14 P15.16 U6.5 U7.11 U7.15 U8.11 U8.15 U9.7

## Polygon pours and split planes (outlines as drawn)
24V+ on Top Layer "Top Layer-24V+" (solid, pour order 0): 1405,4955 1095,4955 1095,1290 1125,1260 1435,1260
24V+ on Top Layer "Top Layer-24V+ 1" (solid, pour order 4): 2100,4880 2100,1430 2105,1425 2385,1425 2385,2075 2545,2235 2810,2235 2810,3840 2730,3920 2195,3920 2195,4875 2190,4880
24V+ on Top Layer "Top Layer-24V+ 2" (solid, pour order 6): 3945,2495
GND on Bottom Layer "Bottom Layer-GND 3" (solid, pour order 12): 3540,4885 3540,4630 8195,4630 8195,4885
GND on Bottom Layer "Bottom Layer-GND 1" (solid, pour order 14): 4270.39,2075 2580,2075 2580,1800 4265,1800
GND on Bottom Layer "Bottom Layer-GND" (solid, pour order 16): 2565,4440 2000,4440 1885,4555 1885,4815 2280,4815 2440,4975 3665,4975 3760,4880 3760,4635 3755,4635 3715,4595 2750,4595
GND on Bottom Layer "Bottom Layer-GND 2" (solid, pour order 10): 2785,3495 2645,3635 2585,3635 2585,4575 2500,4660 1765,4660 1765,1555 2110,1210 2595,1210 2785,1400
24V+ on Bottom Layer "Bottom Layer-24V+" (solid, pour order 8): 2810,1835

## Silkscreen, mask and mechanical layers (free items; w line width, h text height)
Top Overlay:
  text "SIG" at 3375,4924.37 h60
  text "SIG" at 4010,4919.37 h60
  text "SIG" at 4650,4919.37 h60
  text "SIG" at 5290,4919.37 h60
  text "SIG" at 5910,4919.37 h60
  text "SIG" at 6540,4919.37 h60
  text "SIG" at 7175,4919.37 h60
  text "SIG" at 7825,4919.37 h60
  text "A0A1A2" at 2381.26,4915.63 h60
  text "-" at 3610,4909.37 h60
  text "-" at 4245,4904.37 h60
  text "-" at 4885,4904.37 h60
  text "-" at 5525,4904.37 h60
  text "-" at 6145,4904.37 h60
  text "-" at 6775,4904.37 h60
  text "-" at 7410,4904.37 h60
  text "-" at 8060,4904.37 h60
  text "1" at 1070,4880 h60
  text "1" at 2341.26,4775.63 h60
  text "+" at 1040,4770 h60
  text "0" at 2331.26,4605.63 h60
  text "-" at 1040,4575 h60
  text "+" at 1040,4330 h60
  text "-" at 1040,4135 h60
  text "Power Sel.: 5V | BATT | 24V" at 3060,4039.37 h60
  text "A0A1A2" at 7371.26,4020 h60
  text "Toggle: Left = V out (up to 5V), Right = I out (4-20mA)" at 3050,3949.37 h60
  text "1" at 7331.26,3880 h60
  text "+" at 1040,3875 h60
  text "+" at 4070,3765 h100
  text "BR" at 2405,3735 h60
  text "0" at 7321.26,3710 h60
  text "-" at 1040,3680 h60
  text "BLK" at 2355,3530 h60
  text "+" at 1040,3435 h60
  text "BLU" at 2355,3350 h60
  text "-" at 1040,3240 h60
  text "-" at 4080,3230 h100
  text "A0" at 4574.37,3105 h40
  text "BR" at 2405,3025 h60
  text "A0A1A2" at 7361.26,3005 h60
  text "A1" at 4574.37,3000 h40
  text "+" at 1040,2970 h60
  text "A2" at 4574.37,2895 h40
  text "1" at 7321.26,2865 h60
  text "BLK" at 2355,2820 h60
  text "-" at 1040,2775 h60
  text "Pop. to pull high" at 4524.37,2765 h40
  text "SPI PUR" at 6454.37,2720 h40
  text "0" at 7311.26,2695 h60
  text "BLU" at 2355,2640 h60
  text "A" at 6627.52,2585 h60
  text "+" at 1040,2520 h60
  text "B" at 6627.52,2475 h60
  text "-" at 1040,2325 h60
  text "BR" at 2405,2305 h60
  text "+" at 4195,2290 h100
  text "BLK" at 2355,2100 h60
  text "+" at 1040,2050 h60
  text "BLU" at 2355,1920 h60
  text "CAN" at 6520,1865 h60
  text "-" at 1040,1855 h60
  text "-" at 4195,1740 h100
  text "A" at 6685,1695 h60
  text "Badgerloop:" at 2680,1605 h150
  text "+" at 1040,1595 h60
  text "NC" at 6685,1595 h60
  text "-" at 1040,1400 h60
  text "Navigation" at 2750,1355 h150
  text "8" at 1055,1305 h60
Mechanical 1:
  lines w10: 915,1175 915,5125 8465,5125 8465,1175 915,1175
  text "Board Dimensions: 7550mil (191.77mm) x 3950mil (100.33mm)" at 970,960 h120

## Text inside footprints (layer, text, board x,y; h text height)
J1: Top Overlay "2" at 3630,4314.37 h60 r90; Top Overlay "1" at 3535,4324.37 h60 r90
J2: Top Overlay "2" at 4275,4324.37 h60 r90; Top Overlay "1" at 4180,4334.37 h60 r90
J3: Top Overlay "2" at 4910,4324.37 h60 r90; Top Overlay "1" at 4815,4334.37 h60 r90
J4: Top Overlay "2" at 5555,4324.37 h60 r90; Top Overlay "1" at 5460,4334.37 h60 r90
J5: Top Overlay "2" at 6185,4329.37 h60 r90; Top Overlay "1" at 6090,4339.37 h60 r90
J6: Top Overlay "2" at 6810,4334.37 h60 r90; Top Overlay "1" at 6715,4344.37 h60 r90
J7: Top Overlay "2" at 7445,4329.37 h60 r90; Top Overlay "1" at 7350,4339.37 h60 r90
J8: Top Overlay "2" at 8085,4329.37 h60 r90; Top Overlay "1" at 7990,4339.37 h60 r90
J13: Top Overlay "Micro SD" at 4706.3,2031.46 h60
P12: Top Overlay "USB" at 5688.74,3286.1 h60; Top Overlay "RST" at 5672.99,1490.83 h60; Top Overlay "Nucleo-32" at 5810.79,2034.13 h100 r90
P15: Top Overlay "TOP (USB)" at 6782.91,3862.32 h47.24; Top Overlay "BOTTOM" at 6802.6,2866.26 h47.24; Top Overlay "Place Xsens" at 6798.66,3563.11 h47.24; Top Overlay "Dev Board" at 6794.72,3464.68 h47.24; Top Overlay "Underneath" at 6794.72,3358.39 h47.24
U3: Top Overlay "Buck conv." at 4625.94,3520.47 h60; Top Overlay "IN-" at 4602.32,3721.26 h60; Top Overlay "OUT-" at 4952.72,3721.26 h60; Top Overlay "IN+" at 4602.32,3288.19 h60; Top Overlay "OUT+" at 4944.84,3288.19 h60